# EAGLE board TestBench (EAGLE 6.5.0)

Size 140 x 138.5 mm. Coordinates in mm from the lower left corner, seen from the top.
Outline: 14.96,133.5 14.96,132.5
Outline: 20.04,133.5 20.04,129.96
Outline: 25.12,133.5 25.12,132.5
Outline: 30.2,133.5 30.2,129.96
Outline: 9.88,133.5 9.88,132.5
Outline: 35.28,133.5 35.28,132.5
Outline: 40.36,133.5 40.36,129.96
Outline: 45.44,133.5 45.44,132.5
Outline: 50.52,133.5 50.52,129.96
Outline: 55.6,133.5 55.6,132.5
Outline: 60.68,133.5 60.68,129.96
Outline: 65.76,133.5 65.76,132.5
Outline: 75.92,133.5 75.92,132.5
Outline: 70.84,133.5 70.84,129.96
Outline: 81,133.5 81,129.96
Outline: 86.08,133.5 86.08,132.5
Outline: 91.16,133.5 91.16,129.96
Outline: 96.24,133.5 96.24,132.5
Outline: 101.32,133.5 101.32,129.96
Outline: 14.96,6.1 14.96,5.1
Outline: 20.04,8.64 20.04,5.1
Outline: 25.12,6.1 25.12,5.1
Outline: 30.2,8.64 30.2,5.1
Outline: 35.28,6.1 35.28,5.1
Outline: 40.36,8.64 40.36,5.1
Outline: 45.44,6.1 45.44,5.1
Outline: 50.52,8.64 50.52,5.1
Outline: 55.6,6.1 55.6,5.1
Outline: 60.68,8.64 60.68,5.1
Outline: 65.76,6.1 65.76,5.1
Outline: 75.92,6.1 75.92,5.1
Outline: 70.84,8.64 70.84,5.1
Outline: 81,8.64 81,5.1
Outline: 86.08,6.1 86.08,5.1
Outline: 91.16,8.64 91.16,5.1
Outline: 96.24,6.1 96.24,5.1
Outline: 101.32,8.64 101.32,5.1
Outline: 9.88,8.64 9.88,5.1
Outline: 0,135.5 0,3 arc90 3,0 137,0 arc90 140,3 140,135.5 arc90 137,138.5 3,138.5 arc90 0,135.5
Outline: 10,15 10,123.5 101.32,123.5 101.32,15 10,15
Copper layers (1*16): Top 0.035mm / dielectric 1.5mm / Bottom 0.035mm
Design rules "default": minimum track width 10mil, minimum drill 24mil, track to track 8mil, track to pad 8mil, pad to pad 8mil, via to via 8mil, smd to smd 8mil, copper to edge 40mil, drill to drill 8mil, minimum pad ring 10mil, minimum via ring 8mil, stop-mask expansion 4mil, vias tented up to drill 0mil, thermal gap 10mil
Holes 3.2 mm at 3,135.5 137,135.5 70,3 3,3 70,135.5 137,3 12.42,8 12.42,130.5 17.5,8 17.5,130.5 22.58,8 22.58,130.5 27.66,8 27.66,130.5 32.74,8 32.74,130.5 37.82,8 37.82,130.5 42.9,8 42.9,130.5 47.98,8 47.98,130.5 53.06,8 53.06,130.5 58.14,8 58.14,130.5 63.22,8 63.22,130.5 68.3,8 68.3,130.5 73.38,8 73.38,130.5 78.46,8 78.46,130.5 83.54,8 83.54,130.5 88.62,8 88.62,130.5 93.7,8 93.7,130.5 98.78,8 98.78,130.5

## Footprints (pad centres in the part's own frame; a part is rotated, then mirrored left to right if it is on the bottom)
DC_BARREL_JACK_PTH_2MM = drill 3.5: P1 0,6.475 | drill 3: P2 4.9,3.525; P3 0,0.475
POWER_16 = drill 1.016 pad 1.88 octagon: 1 -6.35,-1.27; 2 -6.35,1.27; 3 -3.81,-1.27; 4 -3.81,1.27; 5 -1.27,-1.27; 6 -1.27,1.27; 7 1.27,-1.27; 8 1.27,1.27; 9 3.81,-1.27; 10 3.81,1.27; 11 6.35,-1.27; 12 6.35,1.27; 13 8.89,-1.27; 14 8.89,1.27; 15 11.43,-1.27; 16 11.43,1.27
OG-POTS_ALPS_POT_VERTICAL = drill 1 pad 1.88: P$1 -2.58,-6.7; P$2 0,-6.7; P$3 2.58,-6.7 | drill 2.2 pad 3.175: P$4 4.4,0; P$5 -4.4,0
3.5MM-JACK-SWITCH-13MM-OUTPUT = smd 2 x 4: RING@1 -3.7,0; SWITCH@1 3.7,0 | smd 2 x 4 bottom: RING@2 -3.7,0; SWITCH@2 3.7,0 | smd 4 x 2: SECOND@1 0,-3.5; TIP@1 0,4.5 | smd 4 x 2 bottom: SECOND@2 0,-3.5; TIP@2 0,4.5

## Placement (x,y rotation side)
J1  [DC_BARREL_JACK_PTH_2MM]  129,135 180 top
U$1  POWER  [POWER_16]  115,115 270 bottom
U$2  POWER  [POWER_16]  135,115 270 top
U$3  POWER  [POWER_16]  110,115 270 top
U$4  [OG-POTS_ALPS_POT_VERTICAL]  130,15 0 top
U$5  [OG-POTS_ALPS_POT_VERTICAL]  130,35 0 top
U$6  [OG-POTS_ALPS_POT_VERTICAL]  130,55 0 top
U$7  [OG-POTS_ALPS_POT_VERTICAL]  130,75 0 top
U$8  AUDIO-JACKOUTPUT  [3.5MM-JACK-SWITCH-13MM-OUTPUT]  110,75 0 top
U$9  AUDIO-JACKOUTPUT  [3.5MM-JACK-SWITCH-13MM-OUTPUT]  110,55 0 top
U$10  AUDIO-JACKOUTPUT  [3.5MM-JACK-SWITCH-13MM-OUTPUT]  110,35 0 top
U$11  AUDIO-JACKOUTPUT  [3.5MM-JACK-SWITCH-13MM-OUTPUT]  110,15 0 top

## Library data of the parts
J1 = dp_devices
U$1-U$11 = EurorackModularParts

## Nets
+5: U$1.11 U$1.12 U$2.11 U$2.12 U$3.11 U$3.12
+12: U$1.9 U$1.10 U$2.9 U$2.10 U$3.9 U$3.10 U$4.P$3 U$5.P$3 U$6.P$3 U$7.P$3
-12: U$1.1 U$1.2 U$2.1 U$2.2 U$3.1 U$3.2 U$4.P$1 U$5.P$1 U$6.P$1 U$7.P$1
CV: U$1.13 U$1.14 U$2.13 U$2.14 U$3.13 U$3.14
GATE: U$1.15 U$1.16 U$2.15 U$2.16 U$3.15 U$3.16
GND: J1.P1 U$1.3 U$1.4 U$1.5 U$1.6 U$1.7 U$1.8 U$2.3 U$2.4 U$2.5 U$2.6 U$2.7 U$2.8 U$3.3 U$3.4 U$3.5 U$3.6 U$3.7 U$3.8 U$8.RING@1 U$8.RING@2 U$9.RING@1 U$9.RING@2 U$10.RING@1 U$10.RING@2 U$11.RING@1 U$11.RING@2
N$2: U$4.P$2 U$8.SECOND@1 U$8.SECOND@2 U$8.TIP@1 U$8.TIP@2
N$7: U$5.P$2 U$9.SECOND@1 U$9.SECOND@2 U$9.TIP@1 U$9.TIP@2
N$8: U$6.P$2 U$10.SECOND@1 U$10.SECOND@2 U$10.TIP@1 U$10.TIP@2
N$9: U$7.P$2 U$11.SECOND@1 U$11.SECOND@2 U$11.TIP@1 U$11.TIP@2

## Tracks (layer width: path | path; a pad name or v marks a point on that pad's centre or on a via)
+5  (5 unrouted)
+12  (9 unrouted)
-12  (9 unrouted)
CV  (5 unrouted)
GATE  (5 unrouted)
GND  (26 unrouted)
N$2  (4 unrouted)
N$7  (4 unrouted)
N$8  (4 unrouted)
N$9  (4 unrouted)